# Altium PCB V2_PCB.PcbDoc (part 2 of 2)
Units mil, origin at the board's own origin, x right, y up, seen from the top; angles counter-clockwise.
Board outline 7874.02 x 5669.29 mil, 2 copper layers (Top Layer, Bottom Layer); 198 components, 155 nets, 639 pads, 218 vias.
Unrouted connection lines stored in the file: 3.
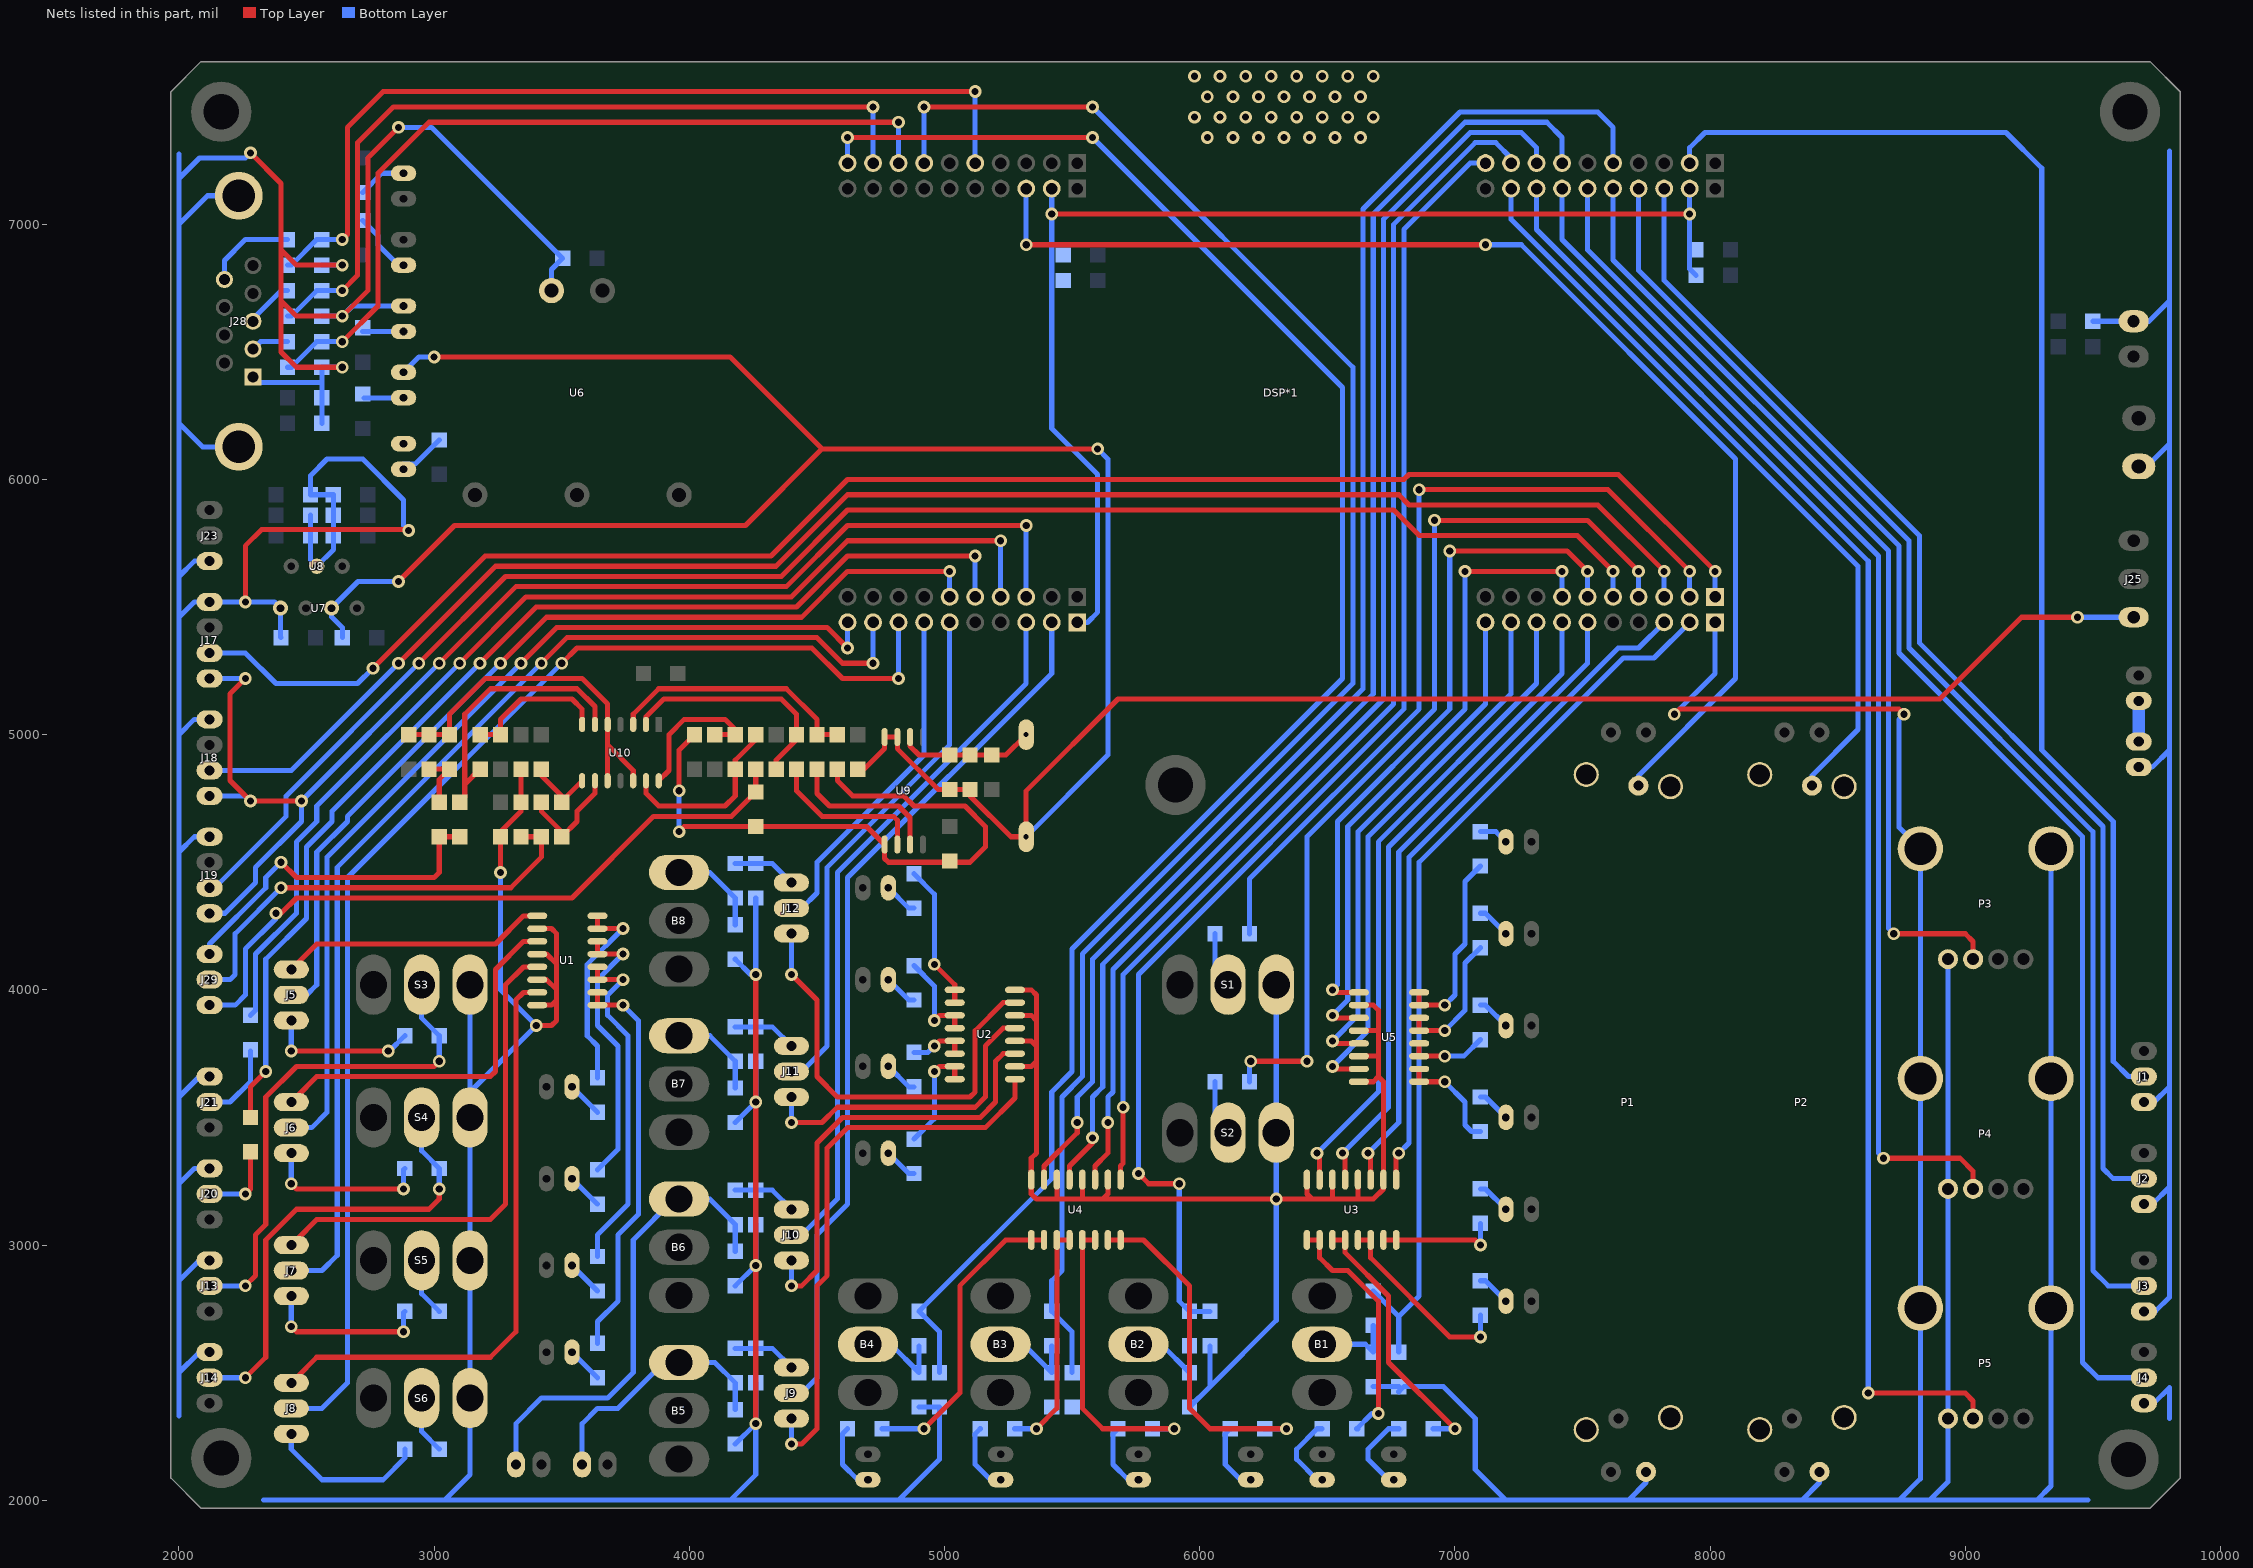
[diagram p2: the nets of this part, all layers, seen from the top]

## Via types
v1: diameter 50, hole 28, Top Layer to Bottom Layer, 218 vias

## Nets (pads, with @x,y where several pads share a name; then routed paths per layer and width w, separated by ;. In a path a pad name is that pad's centre, name@x,y a point inside that pad or via, vN(x,y) a via of type N, cw(c..) or ccw(c..) an arc to the next point about the centre after c; other vN are vias at no path point) (continued)
GND: C1.2 C2.2 C3.2 C4.2 C5.1 C6.1 C7.1 C8.1 C9.2 C10.1 C12.2 C13.2 C14.2 C15.2 C16.2 C17.2 C18.2 C20.1 C21.1 C23.1 C25.2 C26.2 C27.1 C28.2 C29.2 C30.2 C31.2 DS22.K DS23.K DSP*1.20 DSP*1.22 DSP*1.60 DSP*1.62 J1.3 J2.3 J3.3 J4.3 J13.3 J14.3 J17.4 J18.4 J19.4 J20.3 J21.3 J22.1 J23.1 J24.2 J27.2 J28.1 J28.10 J28.11 P1.3 P2.3 P3.1 P4.1 P5.1 R6.2 R7.2 R8.2 R9.2 R27.1 R28.1 R29.1 R30.1 R54.1 R55.1 R56.1 R60.1 R63.1 R67.2 R72.2 R73.2 R77.1 S1.0 S2.0 S3.0 S4.0 S5.0 S6.0 U1.10 U1.12 U1.14 U1.16 U2.10 U2.12 U2.14 U2.16 U3.10 U3.12 U3.14 U3.16 U4.10 U4.12 U4.14 U4.16 U5.10 U5.12 U5.14 U5.16 U6.2 U7.1 U8.2 U9.5 | length 58895.2
  Top Layer w20: v1(2260,5520) 2260,5740 2324,5804 v1@2898,5804 ; v1(2280,7280) 2400,7160 2400,6900 ; v1(2640,6440) 2460,6440 2400,6500 2400,6700 ; v1(2640,6840) 2460,6840 2400,6900 ; v1(2860,7380) 2740,7260 2740,6740 v1(2640,6640) 2460,6640 2400,6700 ; C26.2@2980,4865 R73.2@3060,4865 3020,4825 3020,4755 R67.2@3040,4735 ; v1(3260,4460) C23.1@3260,4600 3260,4620 3340,4700 R72.2@3340,4735 C25.2@3340,4865 ; v1(3400,3860) 3460,3860 3480,3880 3480,3960 ; U1.16@3403.78,3940 3460,3940 3480,3960 ; U1.14@3403.78,4040 3440,4040 3480,4000 ; U1.12@3403.78,4140 3440,4140 3480,4100 ; U1.10@3403.78,4240 3460,4240 3480,4220 3480,4100 ; v1(3960,4620) 3980,4640 R77.1@4260,4640 4694.37,4640 U9.5@4765,4569.37 4765,4515 4780,4500 5100,4500 5160,4560 5160,4640 5080,4720 4880,4720 4840,4760 4640,4760 4580,4820 R60.1@4580,4865 ; v1(3960,4780) 3960,4940 C27.1@4020,5000 ; v1(4260,2300) v1(4260,2920) v1(4260,3560) v1(4260,4060) ; U2.10@5276.22,3700 5340,3700 5360,3720 ; U2.12@5276.22,3800 5340,3800 5360,3780 ; U2.14@5276.22,3900 5340,3900 5360,3880 ; U2.16@5276.22,4000 5340,4000 5360,3980 5360,3880 ; v1(5420,7040) v1(7920,7040) ; U4.14@5440,3256.22 5440,3180 ; U4.12@5540,3256.22 5540,3180 ; U4.10@5640,3256.22 5640,3200 5620,3180 ; U3.16@6420,3256.22 6420,3200 6440,3180 ; U3.14@6520,3256.22 6520,3180 ; U3.12@6620,3256.22 6620,3180 ; U5.16@6623.78,3640 6680,3640 6700,3660 ; U5.14@6623.78,3740 6700,3740 ; U5.12@6623.78,3840 6700,3840 ; U5.10@6623.78,3940 6680,3940 6700,3920 6700,3840 ; v1(7860,5080) 7880,5100 8740,5100 v1(8760,5080) ; 2400,6700 2400,6900 ; 3480,3960 3480,4000 ; 3480,4000 3480,4100 ; 5360,3720 5360,3360 5340,3340 U4.16@5340,3256.22 5340,3200 5360,3180 5440,3180 ; 5360,3720 5360,3780 ; 5360,3780 5360,3880 ; 5440,3180 5540,3180 ; 5540,3180 5620,3180 ; 5620,3180 6440,3180 ; 6440,3180 6520,3180 ; 6520,3180 6620,3180 ; 6620,3180 6680,3180 6720,3220 6720,3640 6700,3660 ; 6700,3660 6700,3740 ; 6700,3740 6700,3840
  Bottom Layer w20: 2000,2330.71 2000,2500 ; 2000,7275.59 2000,7180 ; J14.3@2120,2580 2080,2580 2000,2500 ; J13.3@2120,2940 2080,2940 2000,2860 ; J20.3@2120,3300 2060,3300 2000,3240 ; J21.3@2120,3660 2080,3660 2000,3580 ; J19.4@2120,4600 2060,4600 2000,4540 ; J18.4@2120,5060 2060,5060 2000,5000 ; J23.1@2120,5680 2060,5680 2000,5620 ; J28.10@2234.02,6128.07 2091.93,6128.07 2000,6220 ; J28.11@2234.02,7111.93 2111.93,7111.93 2000,7000 ; v1(2280,7280) 2260,7260 2080,7260 2000,7180 ; J28.1@2289.92,6401.89 2311.81,6380 2560,6380 ; 2330.71,2000 3040,2000 ; C10.1@2400,5380 2397.72,5382.28 U7.1@2397.72,5496.06 2373.78,5520 v1(2260,5520) J17.4@2120,5520 2060,5520 2000,5460 ; C16.2@2515,5860 C15.2@2515,5780 2515,5685 U8.2@2540,5660 2605,5725 C12.2@2605,5780 C14.2@2605,5860 C13.2@2605,5940 C17.2@2515,5940 2515,6015 2580,6080 2720,6080 2880,5920 2880,5820 v1(2900,5800) ; C20.1@2560,6220 C21.1@2560,6320 2560,6380 ; R56.1@2560,6640 v1(2640,6640) 2680,6680 DS23.K@2880,6680 ; R54.1@2560,6840 v1(2640,6840) ; v1(2640,6440) R55.1@2560,6440 2560,6380 ; v1(2860,7380) 2989.88,7380 C9.2@3503.27,6866.61 3460,6823.35 U6.2@3460,6740 ; S3.0@3140,4020 S4.0@3140,3600 ; v1(3260,4460) 3260,4000 v1(3400,3860) S4.0@3140,3600 ; v1(3960,4620) v1(3960,4780) ; R27.1@4180,2220 v1(4260,2300) ; R28.1@4180,2840 v1(4260,2920) C6.1@4260,3080 ; R29.1@4180,3480 v1(4260,3560) C7.1@4260,3720 ; R30.1@4180,4120 4240,4060 v1(4260,4060) C8.1@4260,4360 ; C5.1@4260,2460 v1(4260,2300) ; R9.2@4900,2365 C4.2@4980,2365 4980,2160 4820,2000 ; DSP*1.62@5420,7140 v1(5420,7040) 5420,6200 5600,6020 5600,5480 5560,5440 DSP*1.60@5520,5440 ; R7.2@5960,2365 6040,2445 ; C2.2@6040,2605 6040,2445 ; S2.0@6300,3400 6280,3420 S2.0@6300,3440 ; S1.0@6300,4020 S2.0@6300,3440 ; R6.2@6680,2445 C1.2@6780,2445 ; C1.2@6780,2425 6800,2445 6955,2445 7080,2320 7080,2120 7200,2000 ; P1.3@7748.9,2111.18 7748.9,2068.9 7680,2000 ; v1(7860,5080) 8020,5240 DSP*1.20@8020,5440 ; DSP*1.22@7920,7140 v1(7920,7040) 7920,6825 C31.2@7945,6800 ; P2.3@8428.9,2111.18 8428.9,2068.9 8360,2000 ; v1(8760,5080) 8740,5060 8740,4637.17 P3.1@8824.09,4553.07 P4.1@8824.09,3653.07 P5.1@8824.09,2753.07 8824.09,2084.09 8740,2000 ; P3.1@8932.36,4120 P4.1@8932.36,3220 P5.1@8932.36,2320 8932.36,2072.36 8860,2000 ; P3.1@9335.91,4553.07 P4.1@9335.91,3653.07 P5.1@9335.91,2753.07 9335.91,2055.91 9280,2000 ; 9480,2000 9280,2000 ; R63.1@9500,6620 J22.1@9660,6620 9720,6620 9800,6700 ; J27.2@9680,4872.6 9732.6,4872.6 9800,4940 ; J24.2@9680,6051.02 9711.02,6051.02 9800,6140 ; J4.3@9700,2380 9739.06,2380 9800,2440.94 9800,2319.68 9799.68,2319.68 ; J3.3@9700,2740 9744.72,2740 9800,2795.28 9800,3227.09 ; J2.3@9700,3160 9732.91,3160 9800,3227.09 ; J1.3@9700,3560 9740,3560 9800,3620 ; 9800,7286.61 9800,6700 ; 2000,2500 2000,2860 ; 2000,2860 2000,3240 ; 2000,3240 2000,3580 ; 2000,3580 2000,4540 ; 2000,4540 2000,5000 ; 2000,5000 2000,5460 ; 2000,5460 2000,5620 ; 2000,5620 2000,6220 ; 2000,6220 2000,7000 ; 2000,7000 2000,7180 ; 3040,2000 3140,2100 S6.0@3140,2400 S5.0@3140,2940 S4.0@3140,3500 S4.0@3140,3600 ; 3040,2000 4160,2000 ; 4160,2000 4260,2100 v1(4260,2300) ; 4160,2000 4820,2000 ; 4820,2000 7200,2000 ; 6040,2445 6300,2705 S2.0@6300,3440 ; 7200,2000 7680,2000 ; 7680,2000 8360,2000 ; 8360,2000 8740,2000 ; 8740,2000 8860,2000 ; 8860,2000 9280,2000 ; 9800,3227.09 9800,3620 ; 9800,3620 9800,4940 ; 9800,4940 9800,6140 ; 9800,6140 9800,6700
  other v1: 6300,3180 6030,7340 6130,7340 6230,7340 6330,7340 6430,7340 6530,7340 6630,7340 5980,7420 6080,7420 6180,7420 6280,7420 6380,7420 6480,7420 6580,7420 6680,7420 6030,7500 6130,7500 6230,7500 6330,7500 6430,7500 6530,7500 6630,7500 5980,7580 6080,7580 6180,7580 6280,7580 6380,7580 6480,7580 6580,7580 6680,7580
GND_PS: C11.1 C19.2 C22.2 DS24.K Dz1.1 J25.3 R57.2 U7.3 U9.3 U9.4 | length 12621
  Top Layer w20: v1(2860,5600) 3080,5820 4220,5820 4520,6120 ; v1(3000,6480) 4160,6480 4520,6120 ; C19.2@4660,4865 4685,4865 4765,4945 U9.4@4765,4990.63 U9.3@4815,4990.63 4815,4945 4975,4785 C22.2@5020,4785 R57.2@5100,4785 5100,4760 5260,4600 Dz1.1@5320,4600 5320,4780 5680,5140 8900,5140 9220,5460 v1(9440,5460) ; v1(5600,6120) 4520,6120
  Bottom Layer w20: C11.1@2640,5380 2640,5420 2597.72,5462.28 U7.3@2597.72,5496.06 2701.65,5600 v1(2860,5600) ; DS24.K@2880,6420 2940,6480 v1(3000,6480) ; Dz1.1@5320,4600 5640,4920 5640,6080 v1(5600,6120) ; v1(9440,5460) J25.3@9660,5460
NetB1_1: B1.1 R2.2 R6.1 | length 317.9
  Bottom Layer w20: B1.1@6480,2611.02 6648.98,2611.02 R6.1@6680,2580 R2.2@6680,2685
NetB2_1: B2.1 R3.2 R7.1 | length 351
  Bottom Layer w20: B2.1@5760,2611.02 5848.98,2611.02 R7.1@5960,2500 R3.2@5960,2605
NetB3_1: B3.1 R4.2 R8.1 | length 351
  Bottom Layer w20: B3.1@5220,2611.02 5308.98,2611.02 R8.1@5420,2500 R4.2@5420,2605
NetB4_1: B4.1 R5.2 R9.1 | length 351
  Bottom Layer w20: B4.1@4700,2611.02 4788.98,2611.02 R9.1@4900,2500 R5.2@4900,2605
NetB5_0: B5.0 J15.2 R23.1 R27.2 | length 997.5
  Bottom Layer w20: J15.2@3580,2140 3580,2300 3640,2360 3720,2360 3900,2540 B5.0@3960,2540 4100,2540 R23.1@4180,2460 R27.2@4180,2355
NetB6_0: B6.0 J16.2 R24.1 R28.2 | length 1835.5
  Bottom Layer w20: J16.2@3320,2140 3320,2300 3420,2400 3680,2400 3780,2500 3780,3020 3940,3180 B6.0@3960,3180 4080,3180 R24.1@4180,3080 R28.2@4180,2975
NetB7_0: B7.0 R25.1 R29.2 | length 366.4
  Bottom Layer w20: B7.0@3960,3820 4080,3820 R25.1@4180,3720 R29.2@4180,3615
NetB8_0: B8.0 R26.1 R30.2 | length 366.4
  Bottom Layer w20: B8.0@3960,4460 4080,4460 R26.1@4180,4360 R30.2@4180,4255
NetC1_1: C1.1 DSP*1.19 R2.1 | length 3543.9
  Bottom Layer w20: R2.1@6680,2820 6780,2720 ; C1.1@6780,2580 6780,2720 ; DSP*1.19@7920,5440 7780,5300 7660,5300 6860,4500 6860,2800 6780,2720
NetC2_1: C2.1 DSP*1.10 R3.1 | length 5331.6
  Top Layer w20: v1(5760,3280) 5800,3240 v1(5920,3240)
  Bottom Layer w20: v1(5760,3280) 5760,4060 6800,5100 6800,6980 7060,7240 DSP*1.10@7120,7240 ; v1(5920,3240) 5920,2780 R3.1@5960,2740 C2.1@6040,2740
NetC3_1: C3.1 DSP*1.47 R4.1 | length 6784.4
  Top Layer w20: v1(4920,7460) v1(5580,7460)
  Bottom Layer w20: DSP*1.47@4920,7240 v1(4920,7460) ; C3.1@5500,2500 5500,2660 R4.1@5420,2740 5420,2860 5460,2900 5460,3580 5540,3660 5540,4140 6600,5200 6600,6440 v1(5580,7460)
NetC4_1: C4.1 DSP*1.50 R5.1 | length 7026.7
  Top Layer w20: v1(4620,7340) v1(5580,7340)
  Bottom Layer w20: DSP*1.50@4620,7240 v1(4620,7340) ; C4.1@4980,2500 4980,2660 R5.1@4900,2740 5420,3260 5420,3600 5500,3680 5500,4160 6560,5220 6560,6360 v1(5580,7340)
NetC5_2: C5.2 J9.1 R23.2 | length 251.1
  Bottom Layer w20: R23.2@4180,2595 C5.2@4260,2595 4325,2595 J9.1@4400,2520
NetC6_2: C6.2 J10.1 R24.2 | length 251.1
  Bottom Layer w20: R24.2@4180,3215 C6.2@4260,3215 4325,3215 J10.1@4400,3140
NetC7_2: C7.2 J11.1 R25.2 | length 251.1
  Bottom Layer w20: R25.2@4180,3855 C7.2@4260,3855 4325,3855 J11.1@4400,3780
NetC8_2: C8.2 J12.1 R26.2 | length 251.1
  Bottom Layer w20: R26.2@4180,4495 C8.2@4260,4495 4325,4495 J12.1@4400,4420
NetC22_1: C22.1 Dz1.2 R53.1 R57.1 U9.2 | length 538.3
  Top Layer w20: U9.2@4865,4990.63 4865,4955 4900,4920 C22.1@5020,4920 R57.1@5100,4920 R53.1@5185,4920 5240,4920 Dz1.2@5320,5000
NetC26_1: C26.1 R71.1 R73.1 U10.5 U10.10 U10.12 | length 1441.8
  Top Layer w20: R71.1@2900,5000 C26.1@2980,5000 R73.1@3060,5000 3060,5080 3200,5220 3580,5220 3680,5120 U10.5@3680,5040 3680,4960 ; U10.10@3680,4819.53 3680,4960 ; U10.12@3780,4819.53 3780,4860 3680,4960
NetDS1_K: DS1.K R11.1 | length 141.4
  Bottom Layer w20: DS1.K@3540,3620 R11.1@3640,3520
NetDS2_K: DS2.K R12.1 | length 141.4
  Bottom Layer w20: DS2.K@3540,3260 R12.1@3640,3160
NetDS3_K: DS3.K R13.1 | length 141.4
  Bottom Layer w20: DS3.K@3540,2920 R13.1@3640,2820
NetDS4_K: DS4.K R14.1 | length 141.4
  Bottom Layer w20: DS4.K@3540,2580 R14.1@3640,2480
NetDS5_K: DS5.K R15.1 | length 133.1
  Bottom Layer w20: DS5.K@4780,3360 4860,3280 R15.1@4880,3280
NetDS6_K: DS6.K R16.1 | length 133.1
  Bottom Layer w20: DS6.K@4780,3700 4860,3620 R16.1@4880,3620
NetDS7_K: DS7.K R17.1 | length 133.1
  Bottom Layer w20: DS7.K@4780,4040 4860,3960 R17.1@4880,3960
NetDS8_K: DS8.K R18.1 | length 133.1
  Bottom Layer w20: DS8.K@4780,4400 4860,4320 R18.1@4880,4320
NetDS9_K: DS9.K R33.1 | length 133.1
  Bottom Layer w20: R33.1@7100,3220 7120,3220 DS9.K@7200,3140
NetDS10_K: DS10.K R34.1 | length 133.1
  Bottom Layer w20: R34.1@7100,2860 7120,2860 DS10.K@7200,2780
NetDS11_K: DS11.K R35.1 | length 326.3
  Bottom Layer w20: DS11.K@6760,2080 6740,2080 6660,2160 6660,2200 6740,2280 R35.1@6780,2280
NetDS12_K: DS12.K R36.1 | length 306.3
  Bottom Layer w20: DS12.K@6480,2080 6460,2080 6380,2160 6380,2200 6460,2280 R36.1@6480,2280
NetDS13_K: DS13.K R37.1 | length 273.1
  Bottom Layer w20: R37.1@6120,2280 6100,2260 6100,2140 6160,2080 DS13.K@6200,2080
NetDS14_K: DS14.K R38.1 | length 273.1
  Bottom Layer w20: R38.1@5680,2280 5660,2260 5660,2140 5720,2080 DS14.K@5760,2080
NetDS15_K: DS15.K R39.1 | length 273.1
  Bottom Layer w20: R39.1@5140,2280 5120,2260 5120,2140 5180,2080 DS15.K@5220,2080
NetDS16_K: DS16.K R40.1 | length 273.1
  Bottom Layer w20: R40.1@4620,2280 4600,2260 4600,2140 4660,2080 DS16.K@4700,2080
NetDS17_K: DS17.K R41.1 | length 116.6
  Bottom Layer w20: R41.1@7100,4620 7160,4620 DS17.K@7200,4580
NetDS18_K: DS18.K R42.1 | length 133.1
  Bottom Layer w20: R42.1@7100,4300 7120,4300 DS18.K@7200,4220
NetDS19_K: DS19.K R43.1 | length 133.1
  Bottom Layer w20: R43.1@7100,3940 7120,3940 DS19.K@7200,3860
NetDS20_K: DS20.K R44.1 | length 133.1
  Bottom Layer w20: R44.1@7100,3580 7120,3580 DS20.K@7200,3500
NetDS21_K: DS21.K R49.2 | length 191.1
  Bottom Layer w20: R49.2@2720,7125 2795,7200 DS21.K@2880,7200
NetDS22_A: DS22.A R45.2 | length 179.4
  Bottom Layer w20: DS22.A@2880,6060 2925,6060 R45.2@3020,6155
NetDS23_A: DS23.A R46.2 | length 160
  Bottom Layer w20: R46.2@2720,6580 DS23.A@2880,6580
NetDS24_A: DS24.A R47.2 | length 155
  Bottom Layer w20: R47.2@2725,6320 DS24.A@2880,6320
NetDS25_A: DS25.A R48.2 | length 253
  Bottom Layer w20: R48.2@2720,7015 2780,6955 2780,6920 2860,6840 DS25.A@2880,6840
NetDSP*1_2: DSP*1.2 J1.2 | length 5263.7
  Bottom Layer w20: DSP*1.2@7920,7260 7920,7300 7980,7360 9160,7360 9300,7220 9300,4940 9580,4660 9580,3720 9640,3660 J1.2@9700,3660
NetDSP*1_5: DSP*1.5 U4.15 | length 5623.8
  Top Layer w20: U4.15@5390,3256.22 5390,3310 5520,3440 v1(5520,3480)
  Bottom Layer w20: v1(5520,3480) 5520,3580 5580,3640 5580,4120 6640,5180 6640,7060 7020,7440 7560,7440 7620,7380 DSP*1.5@7620,7240
NetDSP*1_7: DSP*1.7 U4.13 | length 5290.7
  Top Layer w20: U4.13@5490,3256.22 5490,3310 5580,3400 v1(5580,3420)
  Bottom Layer w20: v1(5580,3420) 5580,3580 5620,3620 5620,4100 6680,5160 6680,7040 7040,7400 7360,7400 7420,7340 DSP*1.7@7420,7240
NetDSP*1_8: DSP*1.8 U4.11 | length 5057.5
  Top Layer w20: U4.11@5590,3256.22 5590,3310 5640,3360 v1(5640,3480)
  Bottom Layer w20: v1(5640,3480) 5640,3580 5660,3600 5660,4080 6720,5140 6720,7020 7060,7360 7260,7360 7320,7300 DSP*1.8@7320,7240
NetDSP*1_9: DSP*1.9 U4.9 | length 4824.4
  Top Layer w20: U4.9@5690,3256.22 5690,3310 5700,3320 v1(5700,3540)
  Bottom Layer w20: v1(5700,3540) 5700,4060 6760,5120 6760,7000 7080,7320 7160,7320 7220,7260 DSP*1.9@7220,7240
NetDSP*1_11: DSP*1.11 U5.13 | length 1996.4
  Top Layer w20: v1(6520,3800) 6530,3790 U5.13@6623.78,3790
  Bottom Layer w20: v1(6520,3800) 6620,3900 6620,4620 7120,5120 DSP*1.11@7120,5440
NetDSP*1_12: DSP*1.12 U5.15 | length 2137.9
  Top Layer w20: v1(6520,3700) 6530,3690 U5.15@6623.78,3690
  Bottom Layer w20: v1(6520,3700) 6660,3840 6660,4600 7220,5160 DSP*1.12@7220,5440
NetDSP*1_13: DSP*1.13 U3.15 | length 2544.1
  Top Layer w20: v1(6460,3360) 6470,3350 U3.15@6470,3256.22
  Bottom Layer w20: v1(6460,3360) 6700,3600 6700,4580 7320,5200 DSP*1.13@7320,5440
NetDSP*1_14: DSP*1.14 U3.13 | length 2544.1
  Top Layer w20: v1(6560,3360) 6570,3350 U3.13@6570,3256.22
  Bottom Layer w20: v1(6560,3360) 6740,3540 6740,4560 7420,5240 DSP*1.14@7420,5440
NetDSP*1_15: DSP*1.15 U3.11 | length 2544.1
  Top Layer w20: v1(6660,3360) 6670,3350 U3.11@6670,3256.22
  Bottom Layer w20: v1(6660,3360) 6780,3480 6780,4540 7520,5280 DSP*1.15@7520,5440
NetDSP*1_18: DSP*1.18 U3.9 | length 2665.6
  Top Layer w20: U3.9@6770,3256.22 6770,3350 v1(6780,3360)
  Bottom Layer w20: v1(6780,3360) 6820,3400 6820,4520 7640,5340 7720,5340 DSP*1.18@7820,5440
NetDSP*1_23: DSP*1.23 J2.2 | length 4729
  Bottom Layer w20: DSP*1.23@7820,7140 7820,6780 8820,5780 8820,5360 9540,4640 9540,3300 9580,3260 J2.2@9700,3260
NetDSP*1_24: DSP*1.24 J3.2 | length 5202.2
  Bottom Layer w20: DSP*1.24@7720,7140 7720,6820 8780,5760 8780,5340 9500,4620 9500,2900 9560,2840 J3.2@9700,2840
NetDSP*1_25: DSP*1.25 J4.2 | length 5627
  Bottom Layer w20: DSP*1.25@7620,7140 7620,6860 8740,5740 8740,5320 9460,4600 9460,2540 9520,2480 J4.2@9700,2480
NetDSP*1_26: DSP*1.26 P3.2 | length 3809.8
  Top Layer w20: v1(8720,4220) 9000,4220 9030.79,4189.21 P3.2@9030.79,4120
  Bottom Layer w20: DSP*1.26@7520,7140 7520,6900 8700,5720 8700,4240 v1(8720,4220)
NetDSP*1_27: DSP*1.27 P4.2 | length 4762.9
  Top Layer w20: v1(8680,3340) 8980,3340 9030.79,3289.21 P4.2@9030.79,3220
  Bottom Layer w20: DSP*1.27@7420,7140 7420,6940 8660,5700 8660,3360 v1(8680,3340)
NetDSP*1_28: DSP*1.28 P5.2 | length 5751.2
  Top Layer w20: v1(8620,2420) 9000,2420 9030.79,2389.21 P5.2@9030.79,2320
  Bottom Layer w20: DSP*1.28@7320,7140 7320,6980 8620,5680 v1(8620,2420)
NetDSP*1_29: DSP*1.29 P2.2 | length 2978
  Bottom Layer w20: DSP*1.29@7220,7140 7220,7020 8580,5660 8580,5020 8399.37,4839.37 P2.2@8399.37,4800.16
NetDSP*1_34: DSP*1.34 U5.11 | length 2543.3
  Top Layer w20: v1(6520,3900) 6530,3890 U5.11@6623.78,3890 ; v1(7040,5640) v1(7420,5640)
  Bottom Layer w20: v1(6520,3900) 6580,3960 6580,4640 7040,5100 v1(7040,5640) ; DSP*1.34@7420,5540 v1(7420,5640)
NetDSP*1_35: DSP*1.35 U5.9 | length 2691.6
  Top Layer w20: v1(6520,4000) 6530,3990 U5.9@6623.78,3990 ; v1(6980,5720) 7440,5720 v1(7520,5640)
  Bottom Layer w20: v1(6520,4000) 6540,4020 6540,4660 6980,5100 v1(6980,5720) ; DSP*1.35@7520,5540 v1(7520,5640)
NetDSP*1_36: DSP*1.36 J19.2 | length 6359.3
  Top Layer w20: v1(2940,5280) 3280,5620 4360,5620 4620,5880 6760,5880 6860,5780 7480,5780 v1(7620,5640)
  Bottom Layer w20: J19.2@2120,4400 2140,4400 2420,4680 2420,4760 v1(2940,5280) ; DSP*1.36@7620,5540 v1(7620,5640)
NetDSP*1_37: DSP*1.37 R10.2 | length 3612
  Top Layer w20: v1(6200,3720) v1(6420,3720) ; v1(6920,5840) 7520,5840 v1(7720,5640)
  Bottom Layer w20: R10.2@6195,3640 6195,3715 v1(6200,3720) ; v1(6420,3720) 6420,4600 6920,5100 v1(6920,5840) ; DSP*1.37@7720,5540 v1(7720,5640)
NetDSP*1_38: DSP*1.38 J18.2 | length 6371.6
  Top Layer w20: v1(2860,5280) 3240,5660 4340,5660 4620,5940 6780,5940 6820,5900 7560,5900 v1(7820,5640)
  Bottom Layer w20: J18.2@2120,4860 2440,4860 v1(2860,5280) ; DSP*1.38@7820,5540 v1(7820,5640)
NetDSP*1_39: DSP*1.39 R1.2 | length 3308
  Top Layer w20: v1(6860,5960) 7600,5960 v1(7920,5640)
  Bottom Layer w20: R1.2@6195,4220 6195,4435 6860,5100 v1(6860,5960) ; DSP*1.39@7920,5540 v1(7920,5640)
NetDSP*1_40: DSP*1.40 J17.2 | length 6546.8
  Top Layer w20: v1(2760,5260) 3200,5700 4320,5700 4620,6000 6800,6000 6820,6020 7640,6020 v1(8020,5640)
  Bottom Layer w20: J17.2@2120,5320 2260,5320 2380,5200 2700,5200 v1(2760,5260) ; DSP*1.40@8020,5540 v1(8020,5640)
NetDSP*1_45: DSP*1.45 R50.1 R54.2 | length 3502.7
  Top Layer w20: v1(2640,6940) 2660,6960 2660,7380 2800,7520 v1(5120,7520)
  Bottom Layer w20: R54.2@2425,6840 2440,6840 2540,6940 R50.1@2560,6940 v1(2640,6940) ; DSP*1.45@5120,7240 v1(5120,7520)
NetDSP*1_48: DSP*1.48 R51.1 R55.2 | length 3257.3
  Top Layer w20: v1(2640,6540) 2780,6680 2780,7200 2980,7400 v1(4820,7400)
  Bottom Layer w20: R55.2@2425,6440 2440,6440 2540,6540 R51.1@2560,6540 v1(2640,6540) ; DSP*1.48@4820,7240 v1(4820,7400)
NetDSP*1_49: DSP*1.49 R52.1 R56.2 | length 3159.3
  Top Layer w20: v1(2640,6740) 2700,6800 2700,7320 2840,7460 v1(4720,7460)
  Bottom Layer w20: R56.2@2425,6640 2440,6640 2540,6740 R52.1@2560,6740 v1(2640,6740) ; DSP*1.49@4720,7240 v1(4720,7460)
NetDSP*1_51: DSP*1.51 J6.2 | length 3710.8
  Top Layer w20: v1(3340,5280) 3480,5420 4540,5420 v1(4620,5340)
  Bottom Layer w20: J6.2@2440,3460 2520,3460 2580,3520 2580,4520 v1(3340,5280) ; v1(4620,5340) DSP*1.51@4620,5440
NetDSP*1_52: DSP*1.52 J7.2 | length 4399.1
  Top Layer w20: v1(3420,5280) 3520,5380 4500,5380 4600,5280 v1(4720,5280)
  Bottom Layer w20: J7.2@2440,2900 2560,2900 2620,2960 2620,4480 v1(3420,5280) ; v1(4720,5280) DSP*1.52@4720,5440
NetDSP*1_53: DSP*1.53 J8.2 | length 5043.9
  Top Layer w20: v1(3500,5280) 3560,5340 4480,5340 4600,5220 v1(4820,5220)
  Bottom Layer w20: J8.2@2440,2360 2560,2360 2660,2460 2660,4440 v1(3500,5280) ; v1(4820,5220) DSP*1.53@4820,5440
NetDSP*1_54: DSP*1.54 J12.2 | length 1358.8
  Bottom Layer w20: J12.2@4400,4320 4440,4320 4500,4380 4500,4500 4920,4920 DSP*1.54@4920,5440
NetDSP*1_55: DSP*1.55 J11.2 | length 2040.2
  Bottom Layer w20: J11.2@4400,3680 4440,3680 4540,3780 4540,4480 5020,4960 DSP*1.55@5020,5440
NetDSP*1_58: DSP*1.58 J10.2 | length 2804.5
  Bottom Layer w20: J10.2@4400,3040 4440,3040 4580,3180 4580,4460 5320,5200 DSP*1.58@5320,5440
NetDSP*1_59: DSP*1.59 J9.2 | length 3465.9
  Bottom Layer w20: J9.2@4400,2420 4440,2420 4500,2480 4500,3040 4620,3160 4620,4440 5420,5240 DSP*1.59@5420,5440
NetDSP*1_63: DSP*1.63 P1.2 | length 4785.4
  Top Layer w20: v1(5320,6920) v1(7120,6920)
  Bottom Layer w20: v1(5320,6920) DSP*1.63@5320,7140 ; v1(7120,6920) 7260,6920 8100,6080 8100,5220 7719.37,4839.37 P1.2@7719.37,4800.16
NetDSP*1_75: DSP*1.75 J5.2 | length 3683.9
  Top Layer w20: v1(3260,5280) 3440,5460 4440,5460 4620,5640 v1(5020,5640)
  Bottom Layer w20: J5.2@2440,3980 2500,3980 2540,4020 2540,4540 2660,4660 2660,4680 v1(3260,5280) ; DSP*1.75@5020,5540 v1(5020,5640)
NetDSP*1_76: DSP*1.76 R31.1 | length 4426.8
  Top Layer w20: R31.1@2280,3500 2280,3620 v1(2340,3680) ; v1(3180,5280) 3400,5500 4420,5500 4620,5700 v1(5120,5700)
  Bottom Layer w20: v1(2340,3680) 2340,4120 2500,4280 2500,4560 2600,4660 2600,4700 v1(3180,5280) ; DSP*1.76@5120,5540 v1(5120,5700)
NetDSP*1_77: DSP*1.77 R32.1 | length 4258.5
  Top Layer w20: v1(3100,5280) 3360,5540 4400,5540 4620,5760 v1(5220,5760)
  Bottom Layer w20: R32.1@2280,3900 2300,3920 2300,4140 2460,4300 2460,4580 2540,4660 2540,4720 v1(3100,5280) ; DSP*1.77@5220,5540 v1(5220,5760)
NetDSP*1_78: DSP*1.78 J17.1 J18.1 J19.1 | length 5237.9
  Top Layer w20: v1(2260,5220) 2200,5160 2200,4820 v1(2280,4740) v1(2480,4740) ; v1(3020,5280) 3320,5580 4380,5580 4620,5820 v1(5320,5820)
  Bottom Layer w20: J19.1@2120,4300 2180,4300 2300,4420 2300,4480 2480,4660 v1(2480,4740) v1(3020,5280) ; J18.1@2120,4760 2260,4760 v1(2280,4740) ; J17.1@2120,5220 v1(2260,5220) ; DSP*1.78@5320,5540 v1(5320,5820)
NetJ5_1: J5.1 R19.2 | length 589.9
  Top Layer w20: v1(2440,3760) v1(2820,3760)
  Bottom Layer w20: v1(2440,3760) J5.1@2440,3880 ; v1(2820,3760) 2825,3760 R19.2@2885,3820
NetJ5_3: J5.3 U1.9 | length 1042.5
  Top Layer w20: J5.3@2460,4080 2460,4100 2540,4180 3240,4180 3350,4290 U1.9@3403.78,4290
NetJ6_1: J6.1 R20.2 | length 650.4
  Top Layer w20: v1(2440,3240) 2460,3220 v1(2880,3220)
  Bottom Layer w20: v1(2440,3240) J6.1@2440,3360 ; v1(2880,3220) 2880,3295 R20.2@2885,3300
NetJ6_3: J6.3 U1.11 | length 1450.8
  Top Layer w20: J6.3@2460,3560 2460,3580 2540,3660 3220,3660 3240,3680 3240,4080 3350,4190 U1.11@3403.78,4190
NetJ7_1: J7.1 R21.2 | length 670.4
  Top Layer w20: v1(2440,2680) 2460,2660 v1(2880,2660)
  Bottom Layer w20: v1(2440,2680) J7.1@2440,2800 J7.1@2440,2820 ; v1(2880,2660) 2880,2735 R21.2@2885,2740
NetJ7_3: J7.3 U1.13 | length 1910.8
  Top Layer w20: J7.3@2460,3000 2460,3020 2540,3100 3220,3100 3280,3160 3280,4020 3350,4090 U1.13@3403.78,4090
NetJ8_1: J8.1 R22.2 | length 624.9
  Bottom Layer w20: J8.1@2440,2260 2440,2200 2560,2080 2800,2080 2885,2165 R22.2@2885,2200
NetJ8_3: J8.3 U1.15 | length 2350.8
  Top Layer w20: J8.3@2460,2460 2460,2480 2540,2560 3220,2560 3320,2660 3320,3960 3350,3990 U1.15@3403.78,3990
NetJ9_3: J9.3 U2.9 | length 2232.7
  Top Layer w20: v1(4400,2220) 4440,2220 4500,2280 4500,2840 4540,2880 4540,3380 4620,3460 5160,3460 5276.22,3576.22 U2.9@5276.22,3650
  Bottom Layer w20: v1(4400,2220) J9.3@4400,2320
NetJ10_3: J10.3 U2.11 | length 1739.8
  Top Layer w20: v1(4400,2840) 4440,2840 4500,2900 4500,3400 4600,3500 5140,3500 5200,3560 5200,3720 5230,3750 U2.11@5276.22,3750
  Bottom Layer w20: v1(4400,2840) J10.3@4400,2940
NetJ11_3: J11.3 U2.13 | length 1246.6
  Top Layer w20: v1(4400,3480) 4520,3480 4580,3540 5120,3540 5160,3580 5160,3780 5230,3850 U2.13@5276.22,3850
  Bottom Layer w20: v1(4400,3480) J11.3@4400,3580
NetJ12_3: J12.3 U2.15 | length 1704.6
  Top Layer w20: v1(4400,4060) 4500,3960 4500,3660 4580,3580 5100,3580 5120,3600 5120,3840 5230,3950 U2.15@5276.22,3950
  Bottom Layer w20: v1(4400,4060) J12.3@4400,4220
NetJ13_2: J13.2 R19.1 S3.1 | length 1979.7
  Top Layer w20: v1(2260,2840) 2300,2880 2300,3040 2340,3080 2340,3580 2460,3700 3000,3700 v1(3020,3720)
  Bottom Layer w20: J13.2@2120,2840 v1(2260,2840) ; S3.1@2951.02,4020 2951.02,3888.98 R19.1@3020,3820 v1(3020,3720)
NetJ14_2: J14.2 R20.1 S4.1 | length 1808
  Top Layer w20: v1(2260,2480) 2340,2560 2340,3020 2460,3140 2980,3140 3020,3180 v1(3020,3220)
  Bottom Layer w20: J14.2@2120,2480 v1(2260,2480) ; S4.1@2951.02,3500 2951.02,3368.98 R20.1@3020,3300 v1(3020,3220)
NetJ20_2: J20.2 R31.2 | length 313.3
  Top Layer w20: v1(2260,3200) 2280,3220 R31.2@2280,3365
  Bottom Layer w20: J20.2@2120,3200 v1(2260,3200)
NetJ21_2: J21.2 R32.2 | length 313.1
  Bottom Layer w20: J21.2@2120,3560 2200,3560 2280,3640 R32.2@2280,3760
NetJ26_2: J26.2 J27.1 | length 160
  Bottom Layer w50: J27.1@9680,4972.6 J26.2@9680,5132.6
NetJ28_2: J28.2 R51.2 | length 147.1
  Bottom Layer w20: J28.2@2289.92,6510.94 2318.98,6540 R51.2@2425,6540
NetJ28_3: J28.3 R52.2 | length 190.6
  Bottom Layer w20: J28.3@2289.92,6620 2289.92,6629.92 2400,6740 R52.2@2425,6740
NetJ28_9: J28.9 R50.2 | length 355.3
  Bottom Layer w20: J28.9@2178.11,6783.58 2178.11,6858.11 2260,6940 R50.2@2425,6940
NetJ29_1: J29.1 R74.2 R77.2 | length 2693
  Top Layer w20: v1(2380,4300) 2400,4300 2460,4360 3540,4360 3860,4680 4165,4680 R77.2@4260,4775 R74.2@4260,4865
  Bottom Layer w20: J29.1@2120,3940 2220,3940 2260,3980 2260,4160 2380,4280 v1(2380,4300)
NetJ29_2: J29.2 R68.1 R72.1 | length 1752.5
  Top Layer w20: v1(2400,4400) 3300,4400 3420,4520 R68.1@3420,4600 R72.1@3340,4600
  Bottom Layer w20: J29.2@2120,4040 2200,4040 2220,4060 2220,4220 v1(2400,4400)
NetJ29_3: J29.3 R64.1 R67.1 | length 1349.1
  Top Layer w20: v1(2400,4500) 2460,4440 3000,4440 3020,4460 R67.1@3020,4600 R64.1@3100,4600
  Bottom Layer w20: J29.3@2120,4140 2120,4180 2340,4400 2340,4440 v1(2400,4500)
NetR1_1: R1.1 S1.1 | length 233.8
  Bottom Layer w20: R1.1@6060,4220 6060,4071.02 S1.1@6111.02,4020 S1.1@6120,4028.98
NetR10_1: R10.1 S2.1 | length 233.8
  Bottom Layer w20: R10.1@6060,3640 6060,3491.02 S2.1@6111.02,3440 S2.1@6120,3448.98
NetR11_2: R11.2 U1.7 U1.8 | length 809.6
  Top Layer w20: U1.8@3640,4290 U1.7@3640,4240 v1(3740,4240)
  Bottom Layer w20: R11.2@3640,3655 3640,3780 3600,3820 3600,4100 v1(3740,4240)
NetR12_2: R12.2 U1.5 U1.6 | length 1102.7
  Top Layer w20: U1.6@3640,4190 U1.5@3640,4140 v1(3740,4140)
  Bottom Layer w20: R12.2@3640,3295 3720,3375 3720,3780 3640,3860 3640,4040 v1(3740,4140)
NetR13_2: R13.2 U1.3 U1.4 | length 1342.7
  Top Layer w20: U1.4@3640,4090 U1.3@3640,4040 v1(3740,4040)
  Bottom Layer w20: R13.2@3640,2955 3640,3040 3760,3160 3760,3820 3680,3900 3680,3980 v1(3740,4040)
NetR14_2: R14.2 U1.1 U1.2 | length 1566.1
  Top Layer w20: U1.2@3640,3990 U1.1@3640,3940 v1(3740,3940)
  Bottom Layer w20: R14.2@3640,2615 3640,2700 3720,2780 3720,3040 3800,3120 3800,3880 v1(3740,3940)
NetR15_2: R15.2 U2.7 U2.8 | length 436.4
  Top Layer w20: v1(4960,3680) 4980,3700 U2.7@5040,3700 U2.8@5040,3650
  Bottom Layer w20: R15.2@4880,3415 4960,3495 v1(4960,3680)
NetR16_2: R16.2 U2.5 U2.6 | length 228.6
  Top Layer w20: v1(4960,3780) 4980,3800 U2.5@5040,3800 U2.6@5040,3750
  Bottom Layer w20: R16.2@4880,3755 4935,3755 v1(4960,3780)
NetR17_2: R17.2 U2.3 U2.4 | length 386.4
  Top Layer w20: v1(4960,3880) 4980,3900 U2.3@5040,3900 U2.4@5040,3850
  Bottom Layer w20: R17.2@4880,4095 4960,4015 v1(4960,3880)
NetR18_2: R18.2 U2.1 U2.2 | length 551.3
  Top Layer w20: v1(4960,4100) 5040,4020 U2.1@5040,4000 U2.2@5040,3950
  Bottom Layer w20: R18.2@4880,4455 4960,4375 v1@4960,4120
NetR21_1: R21.1 S5.1 | length 228.6
  Bottom Layer w20: S5.1@2951.02,2940 2951.02,2808.98 R21.1@3020,2740
NetR22_1: R22.1 S6.1 | length 228.6
  Bottom Layer w20: S6.1@2951.02,2400 2951.02,2268.98 R22.1@3020,2200
NetR33_2: R33.2 U3.7 U3.8 | length 473.3
  Top Layer w20: U3.7@6720,3020 U3.8@6770,3020 7080,3020 v1(7100,3000)
  Bottom Layer w20: v1(7100,3000) R33.2@7100,3085
NetR34_2: R34.2 U3.5 U3.6 | length 763.4
  Top Layer w20: U3.5@6620,3020 U3.6@6670,3020 6670,2950 6980,2640 v1(7100,2640)
  Bottom Layer w20: v1(7100,2640) R34.2@7100,2725
NetR35_2: R35.2 U3.3 U3.4 | length 1053.1
  Top Layer w20: U3.3@6520,3020 U3.4@6570,3020 6570,2970 6740,2800 6740,2540 v1(7000,2280)
  Bottom Layer w20: R35.2@6915,2280 v1(7000,2280)
NetR36_2: R36.2 U3.1 U3.2 | length 975.3
  Top Layer w20: U3.1@6420,3020 U3.2@6470,3020 6470,2950 6520,2900 6580,2900 6700,2780 v1(6700,2340)
  Bottom Layer w20: R36.2@6620,2280 R36.2@6615,2280 6675,2340 v1(6700,2340)
NetR37_2: R37.2 U4.7 U4.8 | length 1372.7
  Top Layer w20: U4.7@5640,3020 U4.8@5690,3020 5780,3020 5960,2840 5960,2360 6040,2280 v1(6340,2280)
  Bottom Layer w20: R37.2@6255,2280 v1(6340,2280)
NetR38_2: R38.2 U4.5 U4.6 | length 1188.1
  Top Layer w20: U4.6@5590,3020 U4.5@5540,3020 5540,2360 5620,2280 v1(5900,2280)
  Bottom Layer w20: R38.2@5815,2280 v1(5900,2280)
NetR39_2: R39.2 U4.3 U4.4 | length 908.1
  Top Layer w20: v1(5360,2280) 5440,2360 U4.3@5440,3020 U4.4@5490,3020
  Bottom Layer w20: R39.2@5275,2280 v1(5360,2280)
NetR40_2: R40.2 U4.1 U4.2 | length 1187.5
  Top Layer w20: v1(4920,2280) 5060,2420 5060,2840 5240,3020 U4.1@5340,3020 U4.2@5390,3020
  Bottom Layer w20: R40.2@4755,2280 v1(4920,2280)
NetR41_2: R41.2 U5.7 U5.8 | length 753
  Top Layer w20: U5.8@6860,3990 U5.7@6860,3940 v1(6960,3940)
  Bottom Layer w20: v1(6960,3940) 7000,3980 7000,4140 7040,4180 7040,4425 R41.2@7100,4485
NetR42_2: R42.2 U5.5 U5.6 | length 533
  Top Layer w20: U5.6@6860,3890 U5.5@6860,3840 v1(6960,3840)
  Bottom Layer w20: v1(6960,3840) 7040,3920 7040,4105 R42.2@7100,4165
NetR43_2: R43.2 U5.3 U5.4 | length 316.9
  Top Layer w20: U5.4@6860,3790 U5.3@6860,3740 v1(6960,3740)
  Bottom Layer w20: v1(6960,3740) 7035,3740 R43.2@7100,3805
NetR44_2: R44.2 U5.1 U5.2 | length 423.5
  Top Layer w20: U5.2@6860,3690 U5.1@6860,3640 v1(6960,3640)
  Bottom Layer w20: v1(6960,3640) 7040,3560 7040,3470 7065,3445 R44.2@7100,3445
NetR58_1: R58.1 R60.2 U10.3 | length 991.1
  Top Layer w20: U10.3@3780,5040 3780,5080 3880,5180 4380,5180 4500,5060 R58.1@4500,5000 R60.2@4580,5000
NetR58_2: R58.2 U9.7 | length 605.3
  Top Layer w20: R58.2@4500,4865 4500,4769.5 4549.5,4720 4820,4720 4865,4675 U9.7@4865,4569.37
NetR59_1: R59.1 R61.2 U10.2 | length 922
  Top Layer w20: U10.2@3830,5040 3830,5070 3900,5140 4360,5140 4420,5080 R59.1@4420,5000 4420,4980 4340,4900 R61.2@4340,4865
NetR59_2: R59.2 U9.6 | length 623.3
  Top Layer w20: R59.2@4420,4865 4420,4780 4520,4680 4800,4680 4815,4665 U9.6@4815,4569.37
NetR64_2: R64.2 R65.2 U10.6 | length 1088.6
  Top Layer w20: R64.2@3100,4735 3120,4755 3120,4805 ; R65.2@3180,4865 3120,4805 ; U10.6@3630,5040 3630,5110 3560,5180 3220,5180 3120,5080 3120,4805
NetR65_1: R65.1 R66.1 U10.7 | length 569.7
  Top Layer w20: R65.1@3180,5000 R66.1@3260,5000 3260,5060 3340,5140 3540,5140 3580,5100 U10.7@3580,5040
NetR68_2: R68.2 R69.1 U10.9 | length 441.5
  Top Layer w20: R68.2@3420,4735 3420,4700 3500,4620 R69.1@3500,4600 3560,4660 3560,4700 3630,4770 U10.9@3630,4819.53
NetR69_2: R69.2 R70.2 U10.8 | length 280.8
  Top Layer w20: R70.2@3420,4865 3420,4840 3500,4760 R69.2@3500,4735 3500,4739.53 U10.8@3580,4819.53
NetR74_1: R74.1 R75.2 U10.13 | length 709.9
  Top Layer w20: U10.13@3830,4819.53 3830,4770 3880,4720 4140,4720 4180,4760 R75.2@4180,4865 4180,4900 4260,4980 R74.1@4260,5000
NetR75_1: R75.1 R76.1 U10.14 | length 598.5
  Top Layer w20: U10.14@3880,4819.53 3920,4859.53 3920,5000 3980,5060 4140,5060 R75.1@4180,5020 ; R76.1@4100,5020 R76.1@4100,5000 R75.1@4180,5000
pads on no net: B1.2 B2.2 B3.2 B4.2 B5.2 B6.2 B7.2 B8.2 Con1.1 Con2.1 Con3.1 Con4.1 Con5.1 DSP*1.3 DSP*1.4 DSP*1.16 DSP*1.17 DSP*1.21 DSP*1.30 DSP*1.31 DSP*1.32 DSP*1.33 DSP*1.42 DSP*1.43 DSP*1.44 DSP*1.46 DSP*1.56 DSP*1.57 DSP*1.61 DSP*1.68 DSP*1.69 DSP*1.70 DSP*1.71 DSP*1.72 DSP*1.73 DSP*1.74 DSP*1.79 DSP*1.80 J25.2 J28.4 J28.5 J28.7 J28.8 P1.1' P1.2' P1.3' P2.1' P2.2' P2.3' P3. P4. P5.

## Polygon pours and split planes (outlines as drawn)
GND on Bottom Layer "Bottom Layer-No Net" (solid, pour order 2): 2086.61,7637.8 1968.5,7519.69 1968.5,2086.61 2086.61,1968.5 9724.41,1968.5 9842.52,2086.61 9842.52,7519.69 9724.41,7637.8
GND on Top Layer "Bottom Layer-No Net" (solid, pour order 0): 2086.61,7637.8 1968.5,7519.69 1968.5,2086.61 2086.61,1968.5 9724.41,1968.5 9842.52,2086.61 9842.52,7519.69 9724.41,7637.8

## Other copper
Top Layer:
  pour cut-out: 5890,7520 5890,7440 5920,7440 5920,7520
  pour cut-out: 5890,7400 5890,7320 5920,7320 5920,7400
  pour cut-out: 6740,7640 6740,7560 6770,7560 6770,7640
  pour cut-out: 6740,7520 6740,7440 6770,7440 6770,7520
  pour cut-out: 6740,7400 6740,7320 6770,7320 6770,7400
  pour cut-out: 5890,7640 5890,7560 5920,7560 5920,7640
Bottom Layer:
  pour cut-out: 5890,7640 5890,7560 5920,7560 5920,7640
  pour cut-out: 5890,7520 5890,7440 5920,7440 5920,7520
  pour cut-out: 5890,7400 5890,7320 5920,7320 5920,7400
  pour cut-out: 6740,7400 6740,7320 6770,7320 6770,7400
  pour cut-out: 6740,7520 6740,7440 6770,7440 6770,7520
  pour cut-out: 6740,7640 6740,7560 6770,7560 6770,7640

## Text inside footprints (layer, text, board x,y; h text height)
J28: Top Overlay "6" at 2055.87,6436.73 h59.06 r90; Top Overlay "9" at 2055.87,6763.9 h59.06 r90; Top Overlay "5" at 2425.94,6818.43 h59.06 r90; Top Overlay "1" at 2425.94,6392.05 h59.06 r90